# Altium PCB Hat_PCB.PcbDoc (part 2 of 2)
Units mm, origin at the board's own origin, x right, y up, seen from the top; angles counter-clockwise.
Board outline 64 x 85 mm, 4 copper layers (Top Layer, Ground Plane, Power Plane, Bottom Layer), stack 0.844 mm thick; 117 components, 70 nets, 335 pads, 93 vias.
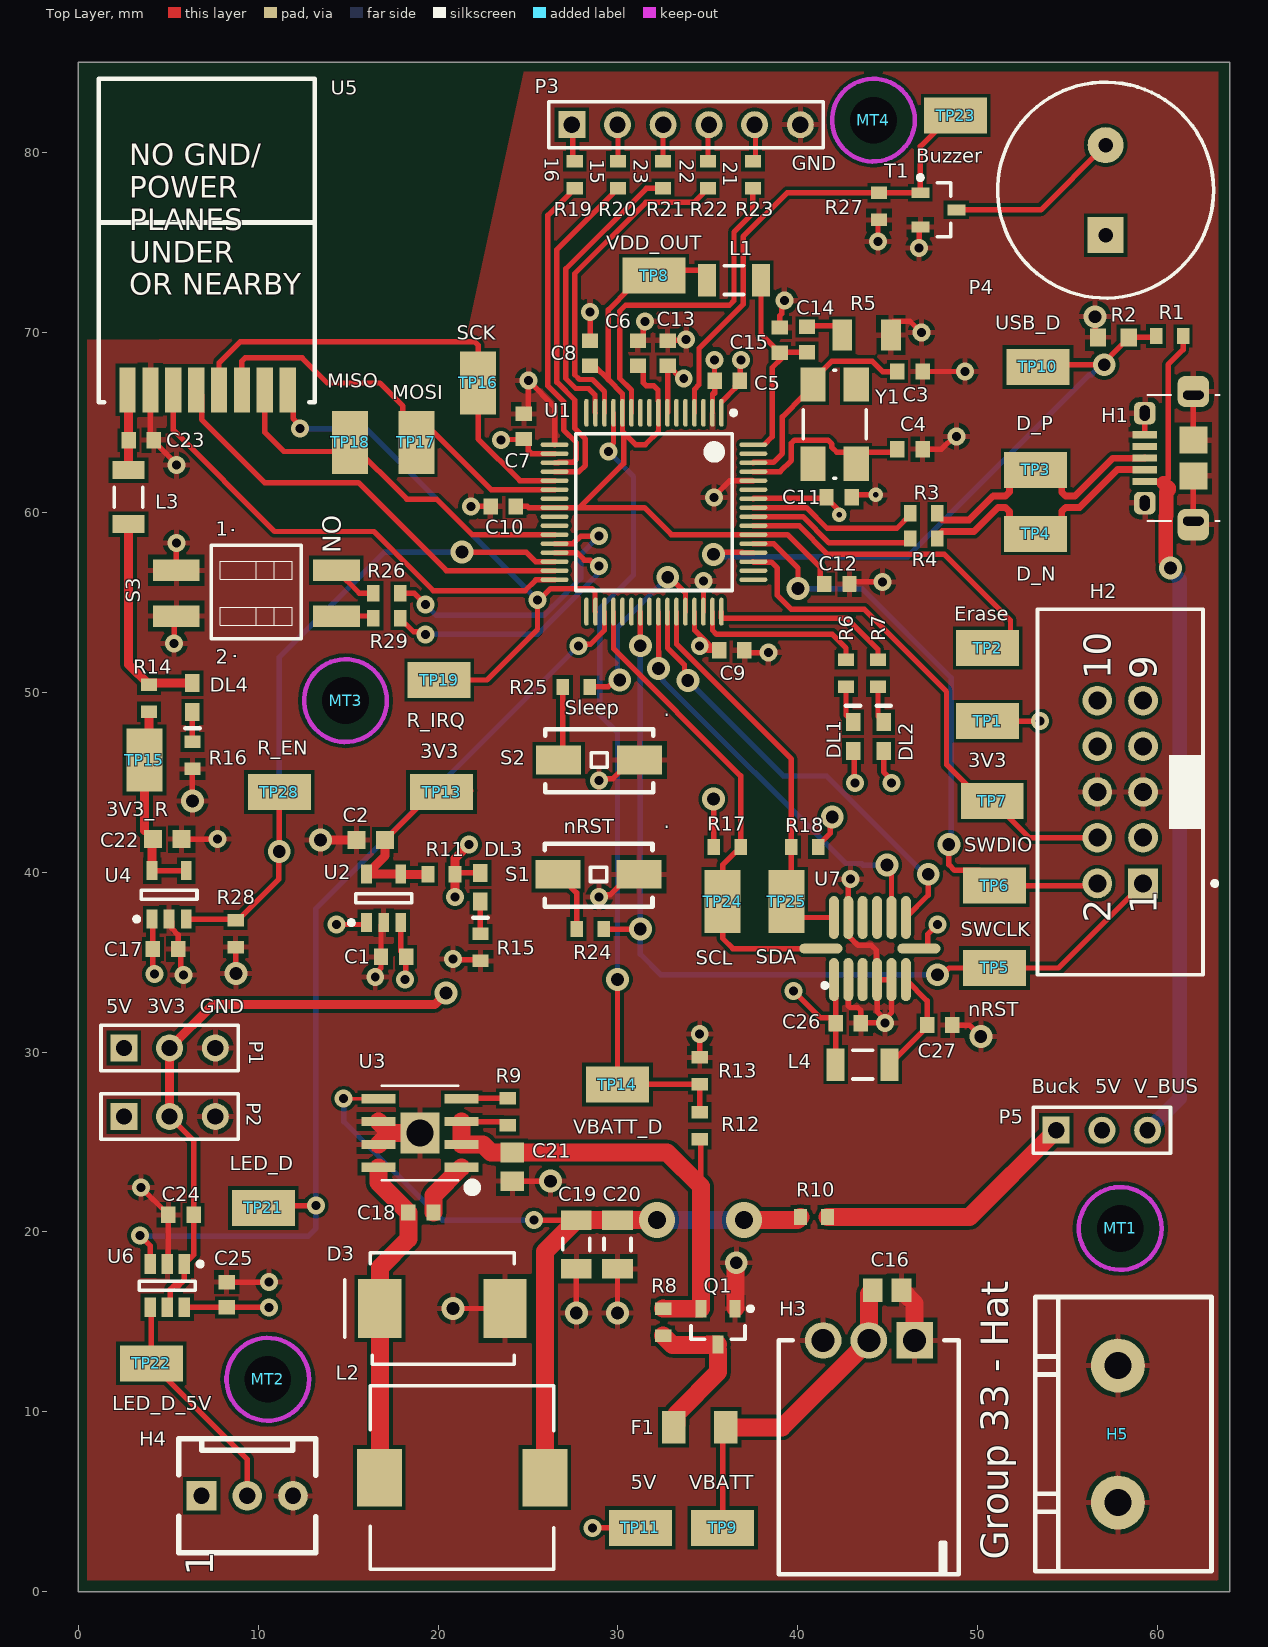
[diagram p0: Top Layer view]

## Via types
v1: diameter 1, hole 0.5, Top Layer to Bottom Layer, 57 vias
v2: diameter 1.27, hole 0.711, Top Layer to Bottom Layer, 30 vias
v3: diameter 0.8, hole 0.3, Top Layer to Bottom Layer, 2 vias
v4: diameter 2, hole 1, Top Layer to Bottom Layer, 2 vias
v5: diameter 1, hole 0.5, Top Layer to Bottom Layer, tented top, 1 vias
v6: diameter 2, hole 1.5, Top Layer to Bottom Layer, 1 vias

## Nets (pads, with @x,y where several pads share a name; then routed paths per layer and width w, separated by ;. In a path a pad name is that pad's centre, name@x,y a point inside that pad or via, vN(x,y) a via of type N, cw(c..) or ccw(c..) an arc to the next point about the centre after c; other vN are vias at no path point) (continued)
RADIOCONFIG_0: (continued)
  Bottom Layer w0.3: v1(19.304,54.864) 19.9,54.268 25.175,54.268 25.177,54.266 25.881,54.266 26.379,54.764 26.379,54.768 27.94,56.329 27.94,57.658 v1(28.956,58.674)
RADIOCONFIG_1: R29.2 U1.29 | length 16
  Top Layer w0.3: R29.2 18.65,53.347 19.17,53.347 v1(19.304,53.213) ; U1.29 27.717,57.75 28.129,57.339 28.451,57.339 28.767,57.023 v1(28.956,57.023)
  Bottom Layer w0.3: v1(19.304,53.213) 25.531,53.213 26.084,53.766 26.088,53.766 26.879,54.557 26.879,54.561 28.822,56.504 28.822,56.889 v1(28.956,57.023)
SCK: TP16.1 U1.21 U5.5 | length 26.9
  Top Layer w0.3: U5.5 7.829,68.3 8.998,69.469 22.049,69.469 22.225,69.293 TP16.1 22.225,64.076 24.551,61.75 U1.21
SCL: R17.1 TP24.1 U1.36 U7.14 | length 27.2
  Top Layer w0.3: U1.36 29.75,52.415 36.818,45.347 R17.1 35.814,40.398 TP24.1 35.814,36.322 36.386,35.75 U7.14
SDA: R18.1 TP25.1 U1.43 U7.13 | length 21.9
  Top Layer w0.3: U1.43 33.25,52.67 39.636,46.284 R18.1 39.636,38.62 TP25.1 40.249,37.475 U7.13
SLEEP: R25.2 U1.44 | length 11.2
  Top Layer w0.3: R25.2 29.456,50.292 29.837,50.673 v2(30.099,50.673) ; v2(32.766,56.388) 32.862,56.388 33.75,55.5 U1.44
  Bottom Layer w0.3: v2@30.099,50.546 29.972,50.673 29.972,53.594 v2(32.766,56.388)
STAT0: R6.2 U1.47 | length 9.5
  Top Layer w0.3: U1.47 35.25,53.44 35.477,53.213 41.91,53.213 42.672,52.451 R6.2
STAT1: R7.2 U1.48 | length 10.3
  Top Layer w0.3: U1.48 35.75,54.127 35.775,54.102 42.727,54.102 44.45,52.379 R7.2
SWCLK: H2.2 TP6.1 U1.53 | length 33.9
  Top Layer w0.3: U1.53 38.651,58.25 40.005,56.896 v2(40.005,55.753) ; v2(48.387,41.529) 48.387,40.417 48.711,40.093 50.077,40.093 TP6.1@50.863,39.306 ; TP6.1 56.515,39.243 H2.2
  Bottom Layer w0.3: v2(40.005,55.753) 43.561,55.753 48.514,50.8 48.514,41.656 v2(48.387,41.529)
SWDIO: H2.4 TP7.1 U1.51 | length 29.9
  Top Layer w0.3: U1.51 37.55,57.225 38.533,57.225 38.862,56.896 38.862,55.372 39.632,54.602 43.696,54.602 48.26,50.038 48.26,45.974 49.53,44.704 TP7.1@51.181,44.704 ; TP7.1@49.53,43.942 TP7.1@50.292,43.18 ; TP7.1 52.832,41.91 H2.4
USB_DETECT: R1.1 R2.2 TP10.1 U1.52 | length 37
  Top Layer w0.3: v2(35.306,57.658) 35.423,57.775 36.9,57.775 36.925,57.75 U1.52 ; TP10.1@52.07,68.199 v2(57.023,68.199) 57.023,68.315 58.381,69.673 R2.2 R1.1@59.905,69.723
  Bottom Layer w0.3: v2(35.306,57.658) 35.433,57.531 46.101,57.531 56.213,67.643 56.327,67.643 56.883,68.199 v2(57.023,68.199)
VBATT_DIVIDED: R12.1 R13.2 TP14.1 U1.13 | length 45.4
  Top Layer w0.3: v1(29.464,63.373) 29.464,63.562 29.75,63.848 U1.13 ; TP14.1 TP14.1@29.972,28.448 ; v2(29.972,34.036) TP14.1@29.972,28.448 ; R12.1 R13.2 31.23,28.206 30.988,28.448 TP14.1@29.972,28.448
  Bottom Layer w0.3: v1(29.464,63.373) 30.861,61.976 30.861,56.515 28.987,54.641 28.987,48.737 29.972,47.752 v2(29.972,34.036)
VBATT_FSD: C21.2 Q1.2 R8.2 R9.1 R12.2 U3.2 U3.3 | length 29.7
  Top Layer w0.3: U3.3 23.661,26.135 R9.1 ; R12.2 34.61,25.092 34.61,22.54
  Top Layer w1: U3.3 U3.2 22.501,24.865 22.944,24.422 C21.2 32.728,24.422 34.61,22.54 Q1.2 32.516,15.732 R8.2
VBUS: H1.1 P5.3 R1.2 | length 46.8
  Top Layer w0.3: H1.1 59.279,61.711 60.403,61.711 60.579,61.886 60.579,68.211 61.405,69.037 R1.2 ; 60.601,61.239 60.601,61.344
  Top Layer w0.8: 60.319,61.626 60.601,61.344 ; 60.601,61.239 60.476,61.114 60.476,59.81 60.452,59.786 60.452,57.277 60.706,57.023 v2(60.706,56.896)
  Bottom Layer w0.8: P5.3 61.214,27.432 61.214,56.261 60.706,56.769 v2(60.706,56.896)
pads on no net: H1.4 H2.3 H2.9 H2.10 MT1.1 MT2.1 MT3.1 MT4.1 U1.3 U1.5 U1.6 U1.9 U1.10 U1.16 U1.23 U1.25 U1.26 U1.33 U1.37 U1.38 U1.40 U1.49 U1.50 U1.59 U1.63 U7.3 U7.10 U7.11 Y1.2 Y1.4

## Polygon pours and split planes (outlines as drawn)
GND on Bottom Layer "GND_L04_P001" (solid, remove dead copper, pour order 1): 63.373,0.762 62.865,0.254 0,0.254 0,85.471 64.008,85.471
GND on Top Layer "GND_L01_P000" (solid, remove dead copper, pour order 0): 0.5,84.6 0.518,84.582 63.373,84.582 63.373,0.508 63.246,0.635 0,0.635
5V on Power Plane (split plane): 19.187,32.512 19.196,32.462 19.198,32.46 19.196,32.458 19.187,32.408 19.196,32.358 19.224,32.316 19.266,32.288 19.316,32.279 63.49,32.279 63.49,0.529 0.629,0.529 0.629,38.237 19.187,38.237
3V3 on Power Plane (split plane): 63.49,32.537 19.445,32.537 19.445,38.354 19.436,38.404 19.408,38.446 19.4,38.45 19.396,38.458 19.354,38.486 19.304,38.495 0.629,38.495 0.629,49.5 0.62,49.55 0.592,49.592 0.55,49.62 0.51,49.627 0.51,69.596 21.844,69.723 24.765,84.455 23.818,84.49 63.49,84.49
GND on Ground Plane (split plane): 63.49,0.51 0.51,0.51 0.51,69.723 16.704,69.723 21.844,69.85 24.747,84.49 63.49,84.49

## Other copper
Top Layer:
  pour cut-out: 0.5,84.7 0.6,84.6 24.765,84.455 21.59,69.723 0.423,69.596
Bottom Layer:
  pour cut-out: 0.5,84.6 24.765,84.455 21.59,69.723 0.404,69.596
Ground Plane (plane layer: these items are gaps in the copper):
  region: 0.5,84.627 24.765,84.582 21.844,69.85 16.704,69.723 0.5,69.723
Power Plane (plane layer: these items are gaps in the copper):
  region: 0.381,85.344 24.765,84.455 21.844,69.723 0.5,69.596
  lines w0.254: 0.5,49.5 0.5,0.4 63.5,0.4 ; 0.508,38.366 19.304,38.366 ; 19.316,32.408 63.5,32.408 ; 19.316,32.512 19.316,38.354

## Silkscreen, mask and mechanical layers (free items; w line width, h text height)
Top Overlay:
  text "16" at 25.931,79.733 h0.8 r270
  text "15" at 28.471,79.606 h0.8 r270
  text "23" at 30.884,79.606 h0.8 r270
  text "22" at 33.424,79.606 h0.8 r270
  text "21" at 35.837,79.479 h0.8 r270
  text "GND" at 39.647,79.017 h0.8
  text "." at 8.532,59.159 h0.8 r270
  text "1" at 7.643,58.697 h0.8
  text "." at 8.659,52.174 h0.8 r270
  text "2" at 7.643,51.585 h0.8
  text "." at 32.535,48.664 h0.8
  text "." at 32.535,42.441 h0.8
  text "5V" at 1.547,32.154 h0.8
  text "3V3" at 3.833,32.154 h0.8
  text "GND" at 6.754,32.154 h0.8
  text "Buck" at 52.982,27.709 h0.8
  text "5V" at 56.538,27.709 h0.8
  text "V_BUS" at 58.697,27.715 h0.8
  text "Group 33 - Hat" at 51.689,1.778 h1.52 r90
Board Outline:
  the board outline again, w0.254

## Dimensions
0,85 to 0,0 on Mechanical 1
64,86 to 0,86 on Mechanical 1

## Text inside footprints (layer, text, board x,y; h text height)
H1: Mechanical 1 "PCB Edge" at 64.246,60.858 h0.52 r90
H2: Top Overlay "9" at 59.932,50.73 h1.5 r90; Top Overlay "10" at 57.392,50.73 h1.5 r90; Top Overlay "1" at 59.932,37.67 h1.5 r90; Top Overlay "2" at 57.392,37.17 h1.5 r90
H4: Top Overlay "1" at 7.493,0.889 h1.52 r90
S3: Top Overlay "ON" at 13.579,59.817 h1 r270
U3: Mechanical 13 "*" at 20.93,24.344 h1.27 r180
U5: Top Overlay "NO GND/ / POWER / PLANES / UNDER / OR NEARBY" at 2.843,72.075 h1.2